# EAGLE board humidity (EAGLE 7.3.0)
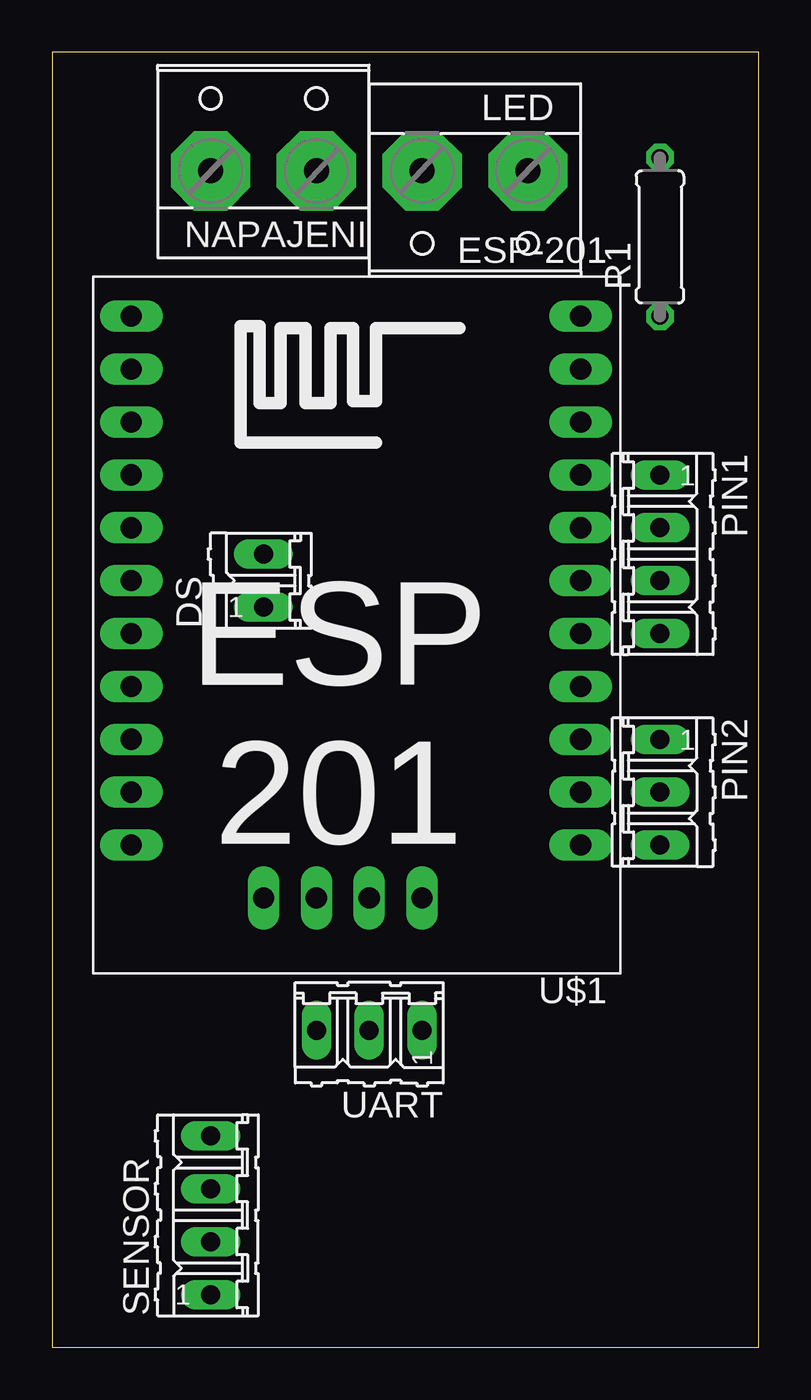
[diagram p0: board, top side]
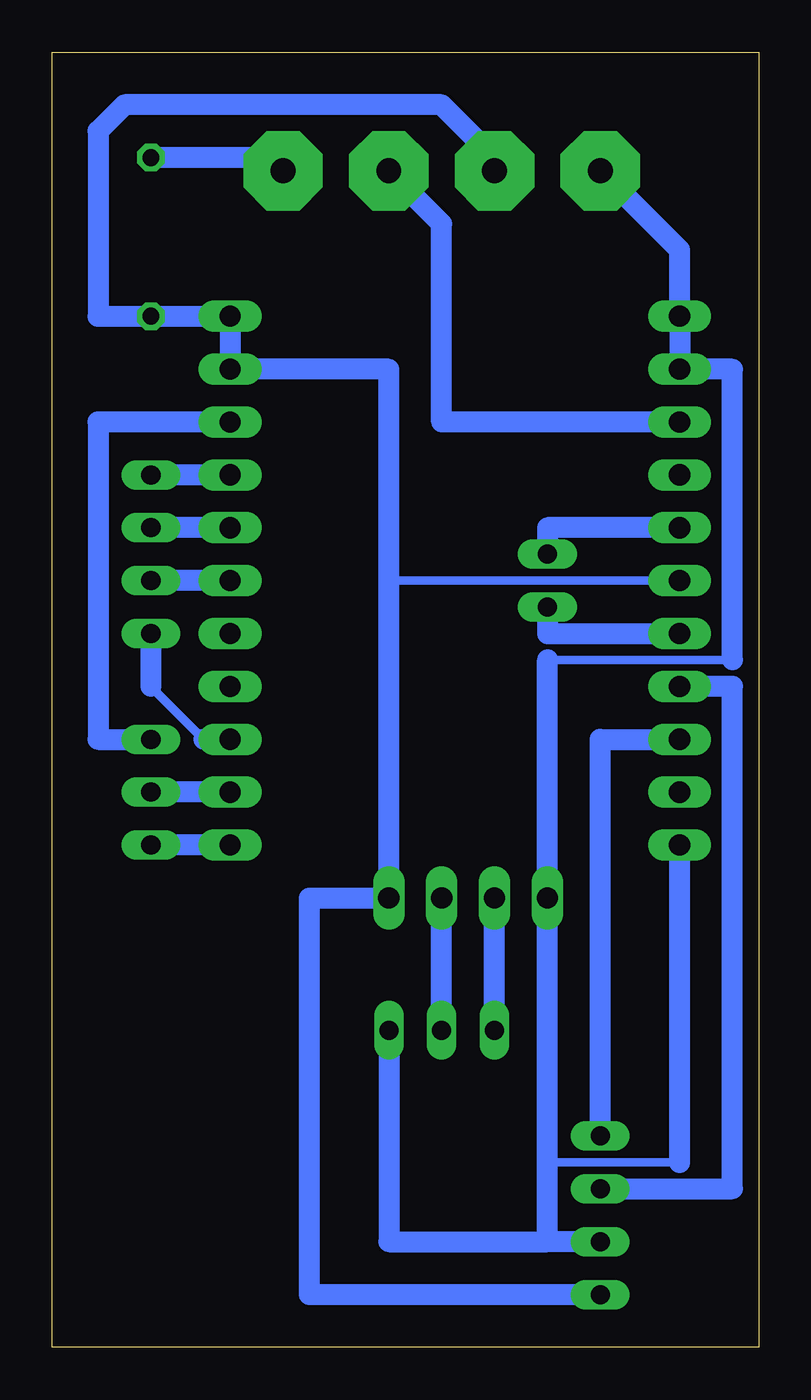
[diagram p1: board, bottom side, seen from below]

Size 33.96 x 62.22 mm. Coordinates in mm from the lower left corner, seen from the top.
Outline: 0,0 33.96,0 33.96,62.22 0,62.22 0,0
Copper layers (1*16): Top 0.035mm / dielectric 1.5mm / Bottom 0.035mm
Design rules "default": minimum track width 10mil, minimum drill 24mil, track to track 8mil, track to pad 8mil, pad to pad 8mil, via to via 8mil, smd to smd 8mil, copper to edge 40mil, drill to drill 8mil, minimum pad ring 10mil, minimum via ring 8mil, stop-mask expansion 4mil, vias tented up to drill 0mil, thermal gap 10mil

## Footprints (pad centres in the part's own frame; a part is rotated, then mirrored left to right if it is on the bottom)
02P = drill 0.914 long: 1 -1.27,0; 2 1.27,0
W237-132 = drill 1.194 pad 3.81 octagon: 1 -2.54,-0.635; 2 2.54,-0.635
04P = drill 0.914 long: 1 -3.81,0; 2 -1.27,0; 3 1.27,0; 4 3.81,0
03P = drill 0.914 long: 1 -2.54,0; 2 0,0; 3 2.54,0
0207/7 = drill 0.813 octagon: 1 -3.81,0; 2 3.81,0
ESP-201 = drill 1.016 long: 3V3 0,2.54; 3V3_2 0,0; 3V3_3 7.62,27.94; ADC 21.59,7.62; CH_PD 21.59,12.7; CLK 0,17.78; CMD 0,15.24; D0 0,12.7; D1 0,10.16; D2 0,20.32; D3 0,7.62; GND 21.59,2.54; GND_2 21.59,0; GND_3 15.24,27.94; GPIO0 0,25.4; GPIO2 0,22.86; GPIO4 0,5.08; GPIO5 21.59,5.08; GPIO12 21.59,20.32; GPIO13 21.59,22.86; GPIO14 21.59,17.78; GPIO15 21.59,25.4; RST 21.59,10.16; RX 10.16,27.94; TX 12.7,27.94; XPD 21.59,15.24

## Placement (x,y rotation side)
DS  [02P]  10.16,36.83 90 top
LED  [W237-132]  20.32,55.88 180 top
NAPAJENI  [W237-132]  10.16,57.15 0 top
PIN1  [04P]  29.21,38.1 270 top
PIN2  [03P]  29.21,26.67 270 top
R1  [0207/7]  29.21,53.34 90 top
SENSOR  [04P]  7.62,6.35 90 top
U$1  ESP-201  [ESP-201]  25.4,49.53 180 top
UART  [03P]  15.24,15.24 180 top

## Library data of the parts
DS PIN1 PIN2 SENSOR UART = con-amp-quick; OC_FARNELL: unknown; OC_NEWARK: unknown
LED NAPAJENI = con-wago-508; OC_FARNELL: unknown; OC_NEWARK: unknown
R1 = rcl
U$1 = esp8266; DIMENSIONS: 25 x 35 mm; PINS: 26; PITCH: 0.1" / 2.54 mm

## Nets
+3V3: NAPAJENI.2 R1.1 SENSOR.1 U$1.3V3 U$1.3V3_2 U$1.3V3_3 U$1.CH_PD
GND: NAPAJENI.1 SENSOR.2 U$1.GND U$1.GND_2 U$1.GND_3 U$1.GPIO15 UART.1
N$1: PIN1.1 U$1.D3
N$2: DS.2 U$1.RST
N$3: SENSOR.3 U$1.GPIO14
N$4: SENSOR.4 U$1.GPIO12
N$5: DS.1 U$1.XPD
N$6: U$1.TX UART.3
N$7: U$1.RX UART.2
N$8: PIN1.2 U$1.D1
N$9: PIN1.3 U$1.D0
N$10: PIN1.4 U$1.D2
N$11: PIN2.3 U$1.GPIO0
N$12: PIN2.2 U$1.GPIO2
N$13: LED.1 R1.2
N$14: PIN2.1 U$1.GPIO4
N$15: LED.2 U$1.GPIO5

## Tracks (layer width: path | path; a pad name or v marks a point on that pad's centre or on a via)
+3V3
  Bottom 0.406: U$1.CH_PD 17.78,36.83
  Bottom 1.016: SENSOR.1 21.59,2.54 21.59,21.59 U$1.3V3_3 17.78,36.83 17.78,46.99 U$1.3V3 U$1.3V3_2 R1.1 31.75,49.53 31.75,58.42 30.48,59.69 15.24,59.69 12.7,57.15 NAPAJENI.2
GND
  Bottom 0.406: 10.16,33.02 1.27,33.02 | 3.81,8.89 10.16,8.89
  Bottom 1.016: SENSOR.2 10.16,5.08 | 10.16,5.08 10.16,8.89 U$1.GND_3 10.16,33.02 | 1.27,33.02 1.27,46.99 U$1.GND U$1.GND_2 3.81,52.7 NAPAJENI.1 | UART.1 17.78,5.08 10.16,5.08 | 3.81,8.89 U$1.GPIO15
N$1
  Bottom 1.016: U$1.D3 PIN1.1
N$2
  Bottom 1.016: U$1.RST 10.16,39.37 DS.2
N$3
  Bottom 1.016: SENSOR.3 1.27,7.62 1.27,31.75 U$1.GPIO14
N$4
  Bottom 1.016: SENSOR.4 7.62,29.21 U$1.GPIO12
N$5
  Bottom 1.016: DS.1 10.16,34.29 U$1.XPD
N$6
  Bottom 1.016: UART.3 U$1.TX
N$7
  Bottom 1.016: UART.2 U$1.RX
N$8
  Bottom 1.016: U$1.D1 PIN1.2
N$9
  Bottom 1.016: U$1.D0 PIN1.3
N$10
  Bottom 0.406: 29.21,31.75 26.67,29.21
  Bottom 1.016: PIN1.4 29.21,31.75 | 26.67,29.21 U$1.D2
N$11
  Bottom 1.016: U$1.GPIO0 PIN2.3
N$12
  Bottom 1.016: U$1.GPIO2 PIN2.2
N$13
  Bottom 1.016: LED.1 23.5,57.15 R1.2
N$14
  Bottom 1.016: U$1.GPIO4 31.75,44.45 31.75,29.21 PIN2.1
N$15
  Bottom 1.016: U$1.GPIO5 15.24,44.45 15.24,53.98 LED.2